# EAGLE board ADQ_DIP (EAGLE 6.3)
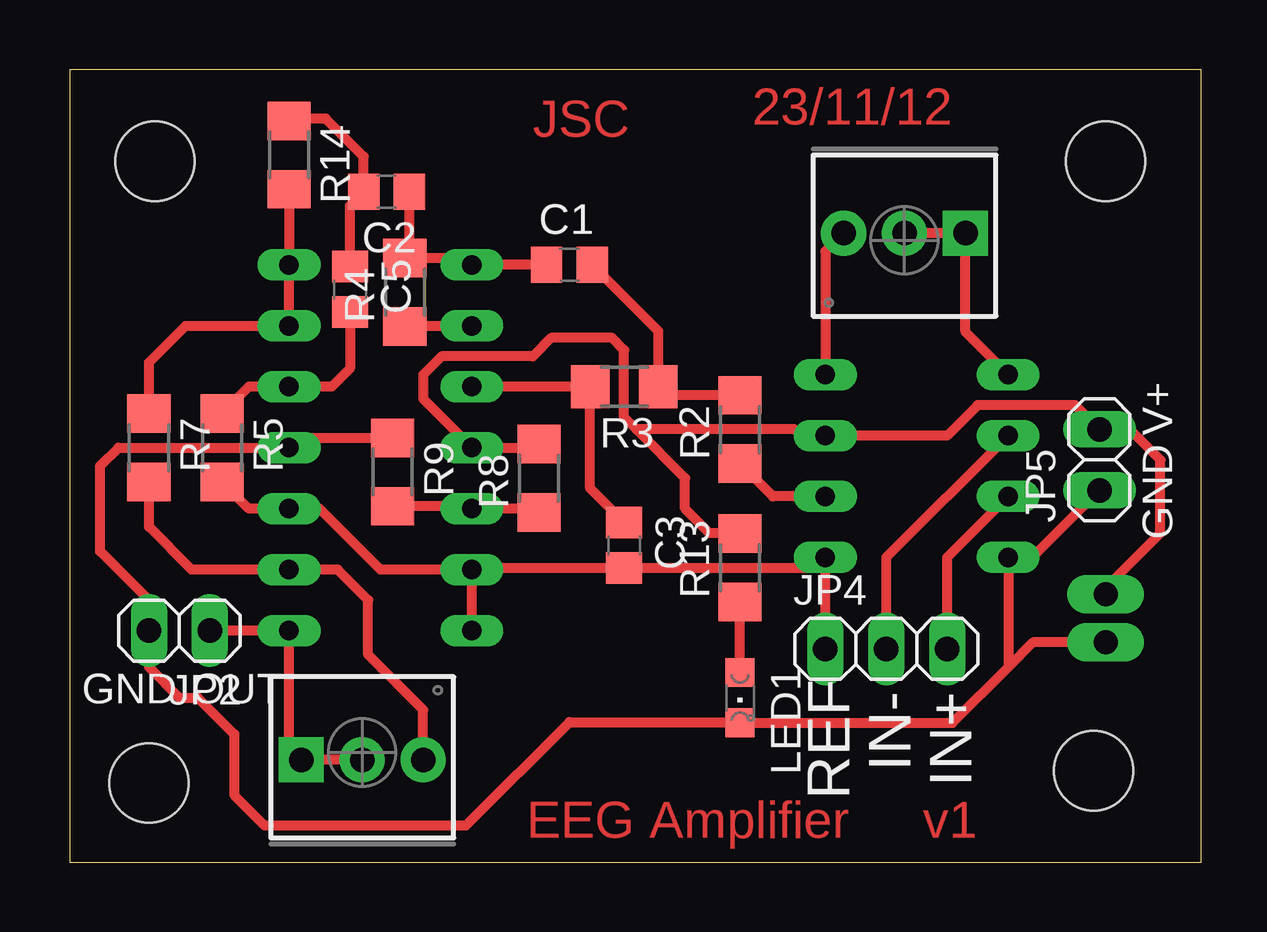
[diagram p0: board, top side]
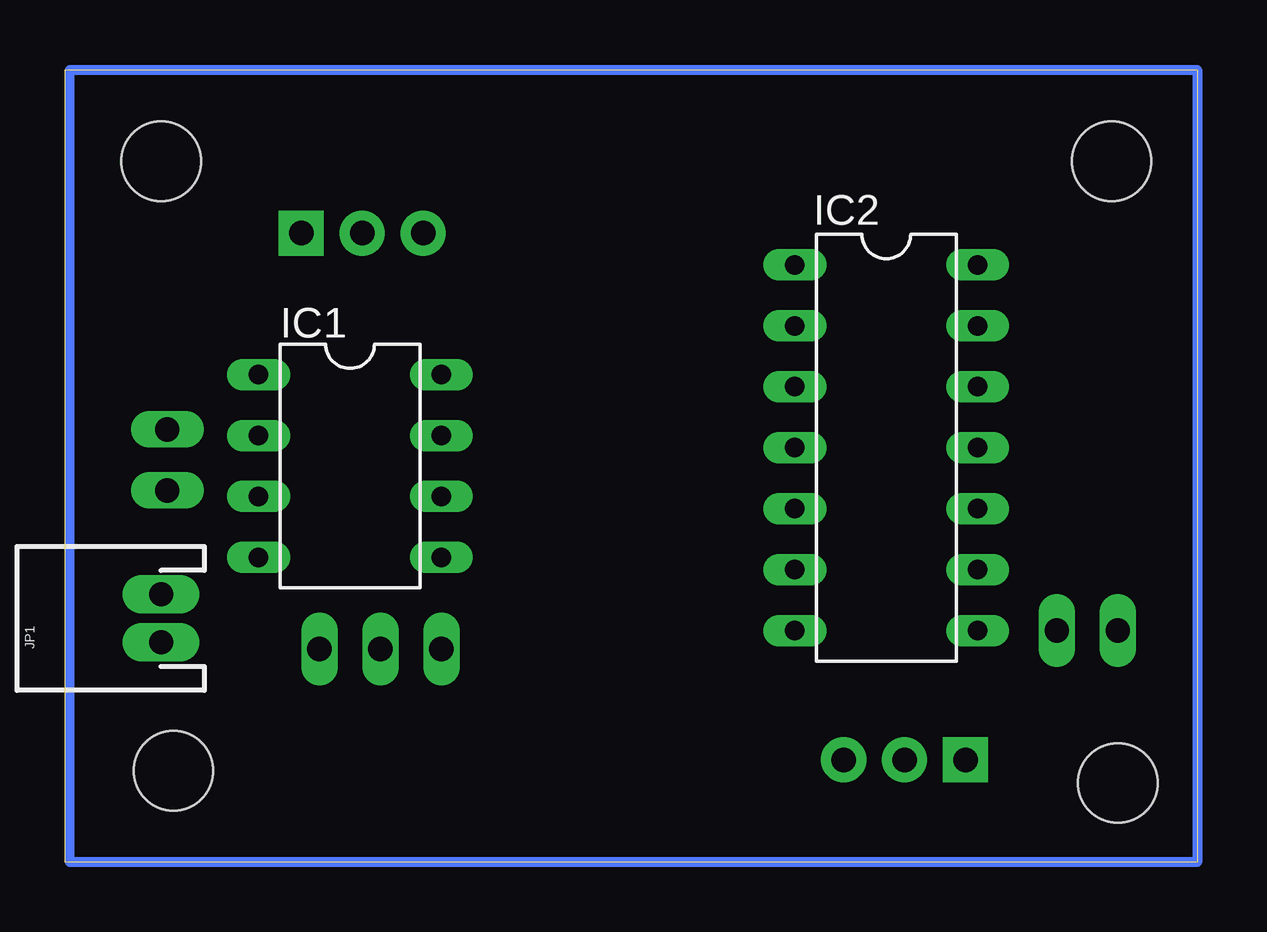
[diagram p1: board, bottom side, seen from below]

Size 47.17 x 33.01 mm. Coordinates in mm from the lower left corner, seen from the top.
Outline: 0,0 47.17,0 47.17,33.01 0,33.01 0,0
Copper layers (1*16): Top 0.035mm / dielectric 1.5mm / Bottom 0.035mm
Design rules "default": minimum track width 10mil, minimum drill 24mil, track to track 16mil, track to pad 16mil, pad to pad 16mil, via to via 16mil, smd to smd 16mil, copper to edge 40mil, drill to drill 8mil, minimum pad ring 10mil, minimum via ring 8mil, stop-mask expansion 4mil, vias tented up to drill 0mil, thermal gap 10mil

## Footprints (pad centres in the part's own frame; a part is rotated, then mirrored left to right if it is on the bottom)
C0805 = smd 1.3 x 1.5: 1 -0.95,0; 2 0.95,0
DIL08 = drill 0.813 long: 1 -3.81,-3.81; 2 -1.27,-3.81; 3 1.27,-3.81; 4 3.81,-3.81; 5 3.81,3.81; 6 1.27,3.81; 7 -1.27,3.81; 8 -3.81,3.81
DIL14 = drill 0.813 long: 1 -7.62,-3.81; 2 -5.08,-3.81; 3 -2.54,-3.81; 4 0,-3.81; 5 2.54,-3.81; 6 5.08,-3.81; 7 7.62,-3.81; 8 7.62,3.81; 9 5.08,3.81; 10 2.54,3.81; 11 0,3.81; 12 -2.54,3.81; 13 -5.08,3.81; 14 -7.62,3.81
JST-2-PTH = drill 1 pad 1.6 long: 1 -1,0; 2 1,0
1X02 = drill 1.016 long: 1 -1.27,0; 2 1.27,0
STAND-OFF = hole 3.302: 0,0
1X03 = drill 1.016 long: 1 -2.54,0; 2 0,0; 3 2.54,0
CHIPLED_0805 = smd 1.2 x 1.2: A 0,-1.05; C 0,1.05
3362U-2 = drill 1.016 pad 1.88 square: 1 -2.54,-0.305 | drill 1.016 pad 1.88: 2 0,-0.305; 3 2.54,-0.305
R1206 = smd 1.6 x 1.803: 1 -1.422,0; 2 1.422,0

## Placement (x,y rotation side)
C1  220n  [C0805]  20.83,24.89 0 top
C2  10u  [C0805]  13.21,27.94 180 top
C3  100n  [C0805]  23.11,13.21 270 top
C5  10u  [C0805]  11.68,23.88 270 top
IC1  AD620N  [DIL08]  35.31,16.51 270 bottom
IC2  TL074P  [DIL14]  12.95,17.27 270 bottom
JP1  [JST-2-PTH]  43.18,10.16 90 bottom
JP2  OUTPUT  [1X02]  4.57,9.65 180 top
JP3  STAND-OFF  [STAND-OFF]  3.3,3.3 0 top
JP4  INPUT  [1X03]  34.04,8.89 0 top
JP5  V+ alt  [1X02]  42.93,16.76 90 top
JP6  STAND-OFF  [STAND-OFF]  3.56,29.21 0 top
JP7  STAND-OFF  [STAND-OFF]  42.67,3.81 0 top
JP8  STAND-OFF  [STAND-OFF]  43.18,29.21 0 top
LED1  GREEN  [CHIPLED_0805]  27.94,6.86 180 top
R1  500 OHM  [3362U-2]  34.8,25.91 180 top
R2  33k  [R1206]  27.94,18.03 90 top
R3  33k  [R1206]  23.11,19.81 180 top
R4  100k  [R1206]  13.97,23.75 90 top
R5  51k  [R1206]  6.35,17.27 270 top
R6  100k OHM  [3362U-2]  12.19,4.57 0 top
R7  1k  [R1206]  3.3,17.27 270 top
R8  51k  [R1206]  19.56,16 90 top
R9  51k  [R1206]  13.46,16.26 270 top
R13  1k  [R1206]  27.94,12.27 90 top
R14  22k  [R1206]  9.14,29.46 270 top

## Library data of the parts
C1-C3 C5 R2-R5 R7-R9 R13 R14 = rcl
IC1 = analog-devices; MF: ALTERA CORPORATION; MPN: AD620AN; OC_FARNELL: 1523782; OC_NEWARK: 05F7108
IC2 = linear
JP1 = juanse
JP2 JP4 JP5 = pinhead
JP3 JP6-JP8 R1 R6 = SparkFun
LED1 = led

## Nets
GND: IC1.4 IC2.11 JP1.1 JP2.2 JP5.1 LED1.C R9.1
IN+: IC1.3 JP4.3
IN-: IC1.2 JP4.2
N$1: IC1.8 R1.3
N$2: IC1.1 R1.1 R1.2
N$3: C1.2 R2.2 R3.1
N$4: IC1.6 R2.1
N$5: C3.1 IC2.3 R3.2
N$6: IC2.2 R4.1
N$7: C1.1 C2.1 IC2.1 R4.2
N$8: LED1.A R13.1
N$9: C2.2 C5.1 R14.1
N$10: IC2.13 IC2.14 R7.1 R14.2
N$11: IC2.5 R8.1 R9.2
N$13: IC2.9 R6.3 R7.2
N$15: C5.2 IC2.12 R5.1
OUT: IC2.8 JP2.1 R6.1 R6.2
VCC: IC1.7 IC2.4 JP1.2 JP5.2 R8.2 R13.2
VCC/2: C3.2 IC1.5 IC2.6 IC2.7 IC2.10 JP4.1 R5.2

## Tracks (layer width: path | path; a pad name or v marks a point on that pad's centre or on a via)
GND
  Top 0.406: 43.69,15.49 JP5.1 40.13,12.7 IC1.4 39.12,8.13 | R9.1 9.55,17.68 IC2.11 2.03,17.27 1.27,16.51 1.27,12.95 3.3,10.92 JP2.2 3.3,8.13 4.57,6.86 5.33,6.86 6.86,5.33 6.86,2.79 8.13,1.52 16.51,1.52 20.83,5.84 27.91,5.84 LED1.C 36.8,5.81 39.12,8.13 | JP1.1 40.15,9.16 39.12,8.13
IN+
  Top 0.406: JP4.3 36.58,12.7 IC1.3
IN-
  Top 0.406: JP4.2 34.04,12.7 IC1.2
N$1
  Top 0.406: R1.3 31.5,25.45 IC1.8
N$2
  Top 0.406: IC1.1 37.34,22.1 R1.1 R1.2
N$3
  Top 0.406: R2.2 24.89,19.46 R3.1 24.54,22.13 C1.2
N$4
  Top 0.406: IC1.6 29.31,15.24 R2.1
N$5
  Top 0.406: IC2.3 R3.2 21.69,15.58 C3.1
N$6
  Top 0.406: IC2.2 16.74,22.33 R4.1
N$7
  Top 0.406: C1.1 IC2.1 16.48,25.17 R4.2 14.16,25.36 C2.1
N$8
  Top 0.406: LED1.A R13.1
N$9
  Top 0.406: C5.1 11.68,27.37 C2.2 12.26,29.4 10.67,30.99 9.25,30.99 R14.1
N$10
  Top 0.406: R14.2 IC2.14 IC2.13 4.83,22.35 3.3,20.83 R7.1
N$11
  Top 0.406: R8.1 19.41,14.73 IC2.5 16.66,14.83 R9.2
N$12
  Bottom 0.406: 0,0 46.99,0 46.99,33.02 0,33.02 0,0
N$13
  Top 0.406: R6.3 14.73,6.35 12.45,8.64 12.45,10.92 11.18,12.19 IC2.9 5.08,12.19 3.3,13.97 R7.2
N$15
  Top 0.406: C5.2 11.68,20.57 10.92,19.81 IC2.12 7.47,19.81 R5.1
OUT
  Top 0.406: R6.2 R6.1 9.14,4.78 IC2.8 JP2.1
VCC
  Top 0.406: 23.62,18.03 30.23,18.03 30.48,17.78 IC1.7 36.58,17.78 37.85,19.05 41.91,19.05 JP5.2 44.2,18.03 45.47,16.76 45.47,13.72 43.18,11.43 JP1.2 | 23.62,18.03 23.11,18.54 23.11,21.34 22.61,21.84 20.07,21.84 19.3,21.08 15.49,21.08 14.73,20.32 14.73,19.3 IC2.4 19.41,17.27 R8.2 | R13.2 27.94,13.72 26.67,13.72 25.65,14.73 25.65,16 23.62,18.03
VCC/2
  Top 0.406: JP4.1 IC1.5 31.05,12.26 C3.2 16.83,12.26 IC2.6 | IC2.7 IC2.6 | IC2.6 12.95,12.19 10.41,14.73 IC2.10 7.47,14.73 R5.2

## Text on the board
Top: 23/11/12 | JSC | EEG Amplifier | v1
tSilk: V+ | GND | REF | GND | OUT | IN- | IN+